# Altium PCB Board.PcbDoc
Units mm, origin at the board's own origin, x right, y up, seen from the top; angles counter-clockwise.
Board outline 40 x 40 mm, 2 copper layers (Top Layer, Bottom Layer); 33 components, 28 nets, 105 pads, 38 vias.
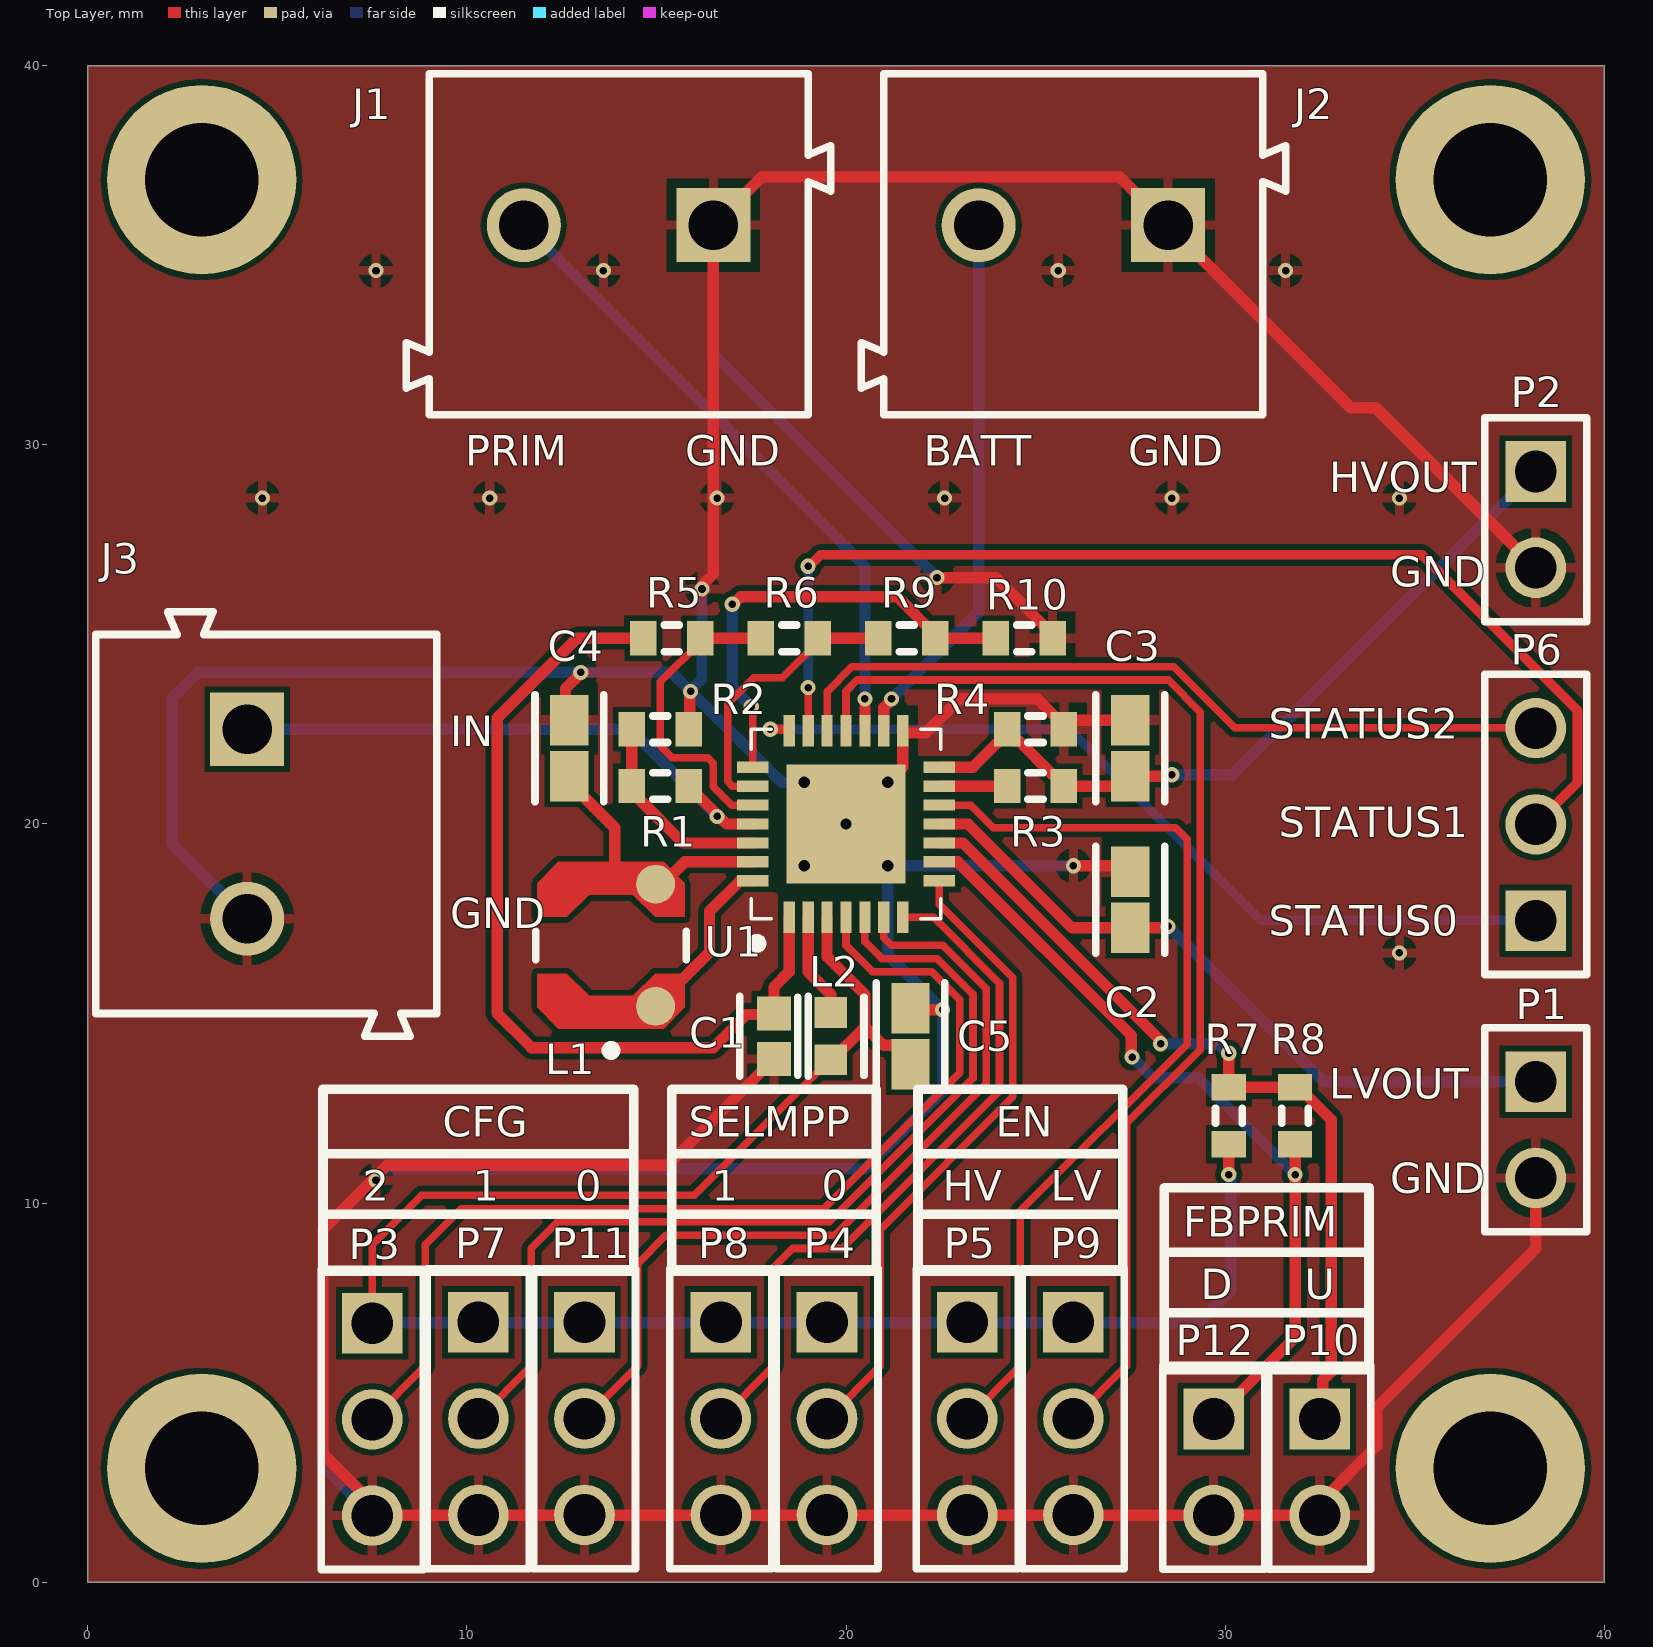
[diagram p0: Top Layer view]
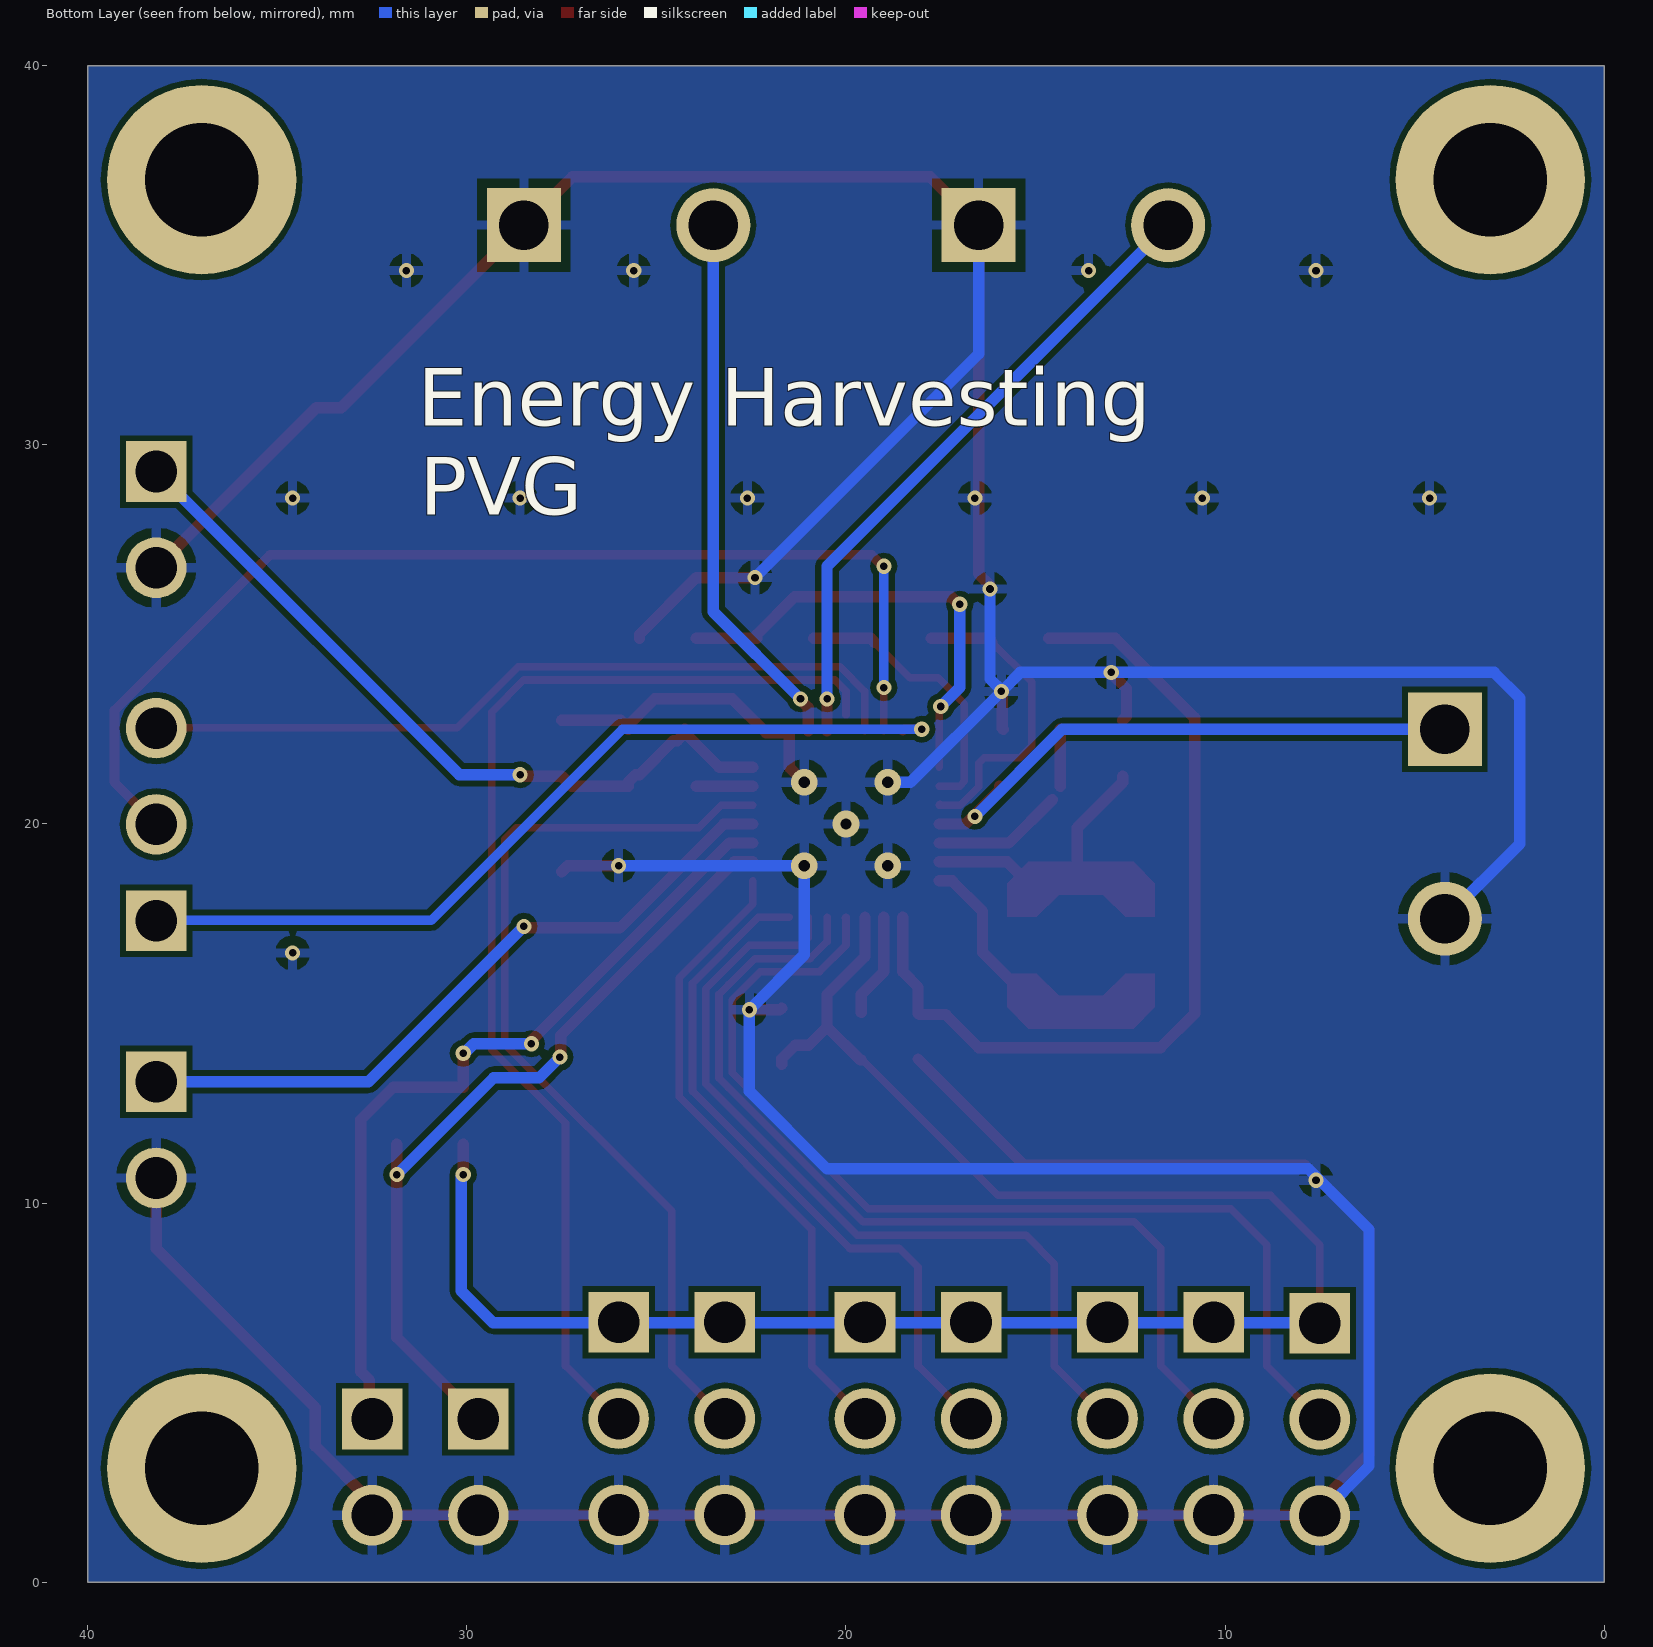
[diagram p1: Bottom Layer view, seen from below]
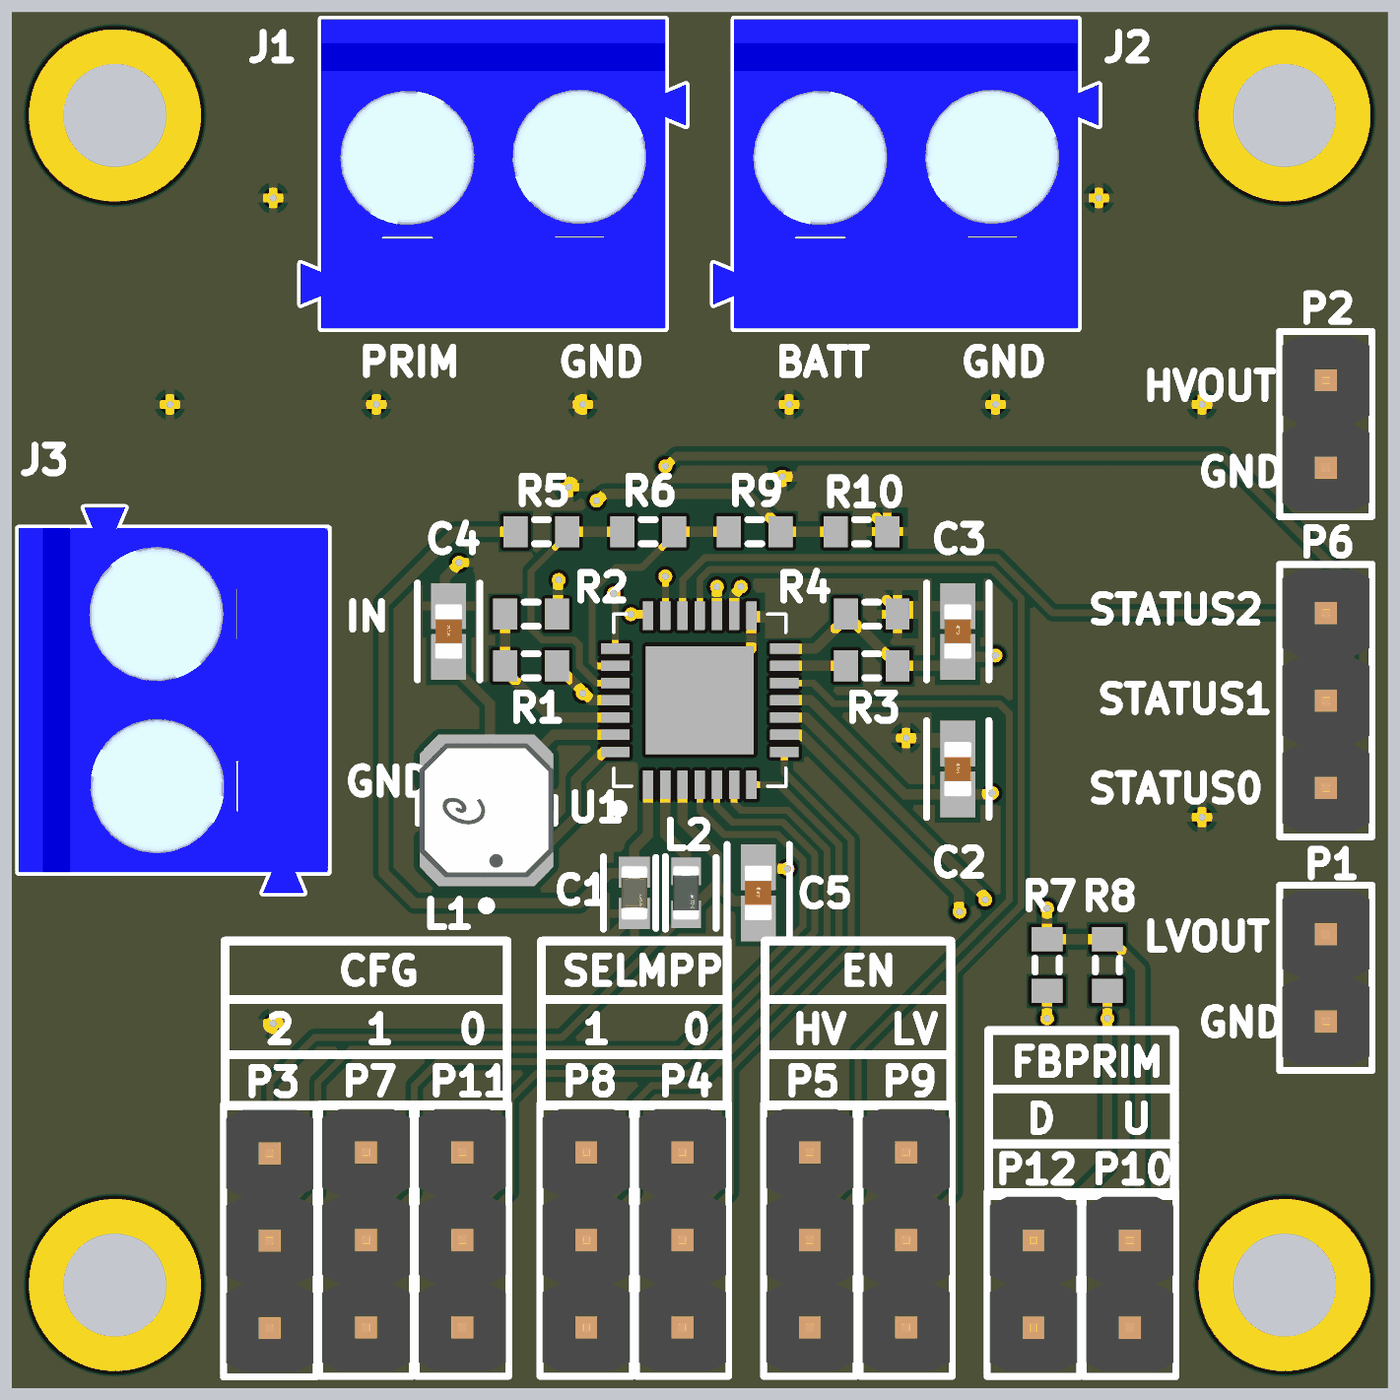
[diagram p2: 3D render of the assembled board from above, using the file's embedded part models]

## Layer stack, top to bottom
Top Solder: solder mask 0.0102, Solder Resist, Dk 3.5
Top Layer: signal copper 0.0356
Dielectric 1: dielectric 0.32, FR-4, Dk 4.8
Bottom Layer: signal copper 0.0356
Bottom Solder: solder mask 0.0102, Solder Resist, Dk 3.5

## Board outline
0,0 0,40 40,40 40,0

## Design rules (kind name [scope] priority, off if disabled: settings)
Clearance [All] p1: gap=0.15 ignorepadtopadclearanceinfootprint=FALSE
PolygonConnect [All] p1: connectstyle=Relief reliefconductorwidth=0.254 reliefentries=4 polygonreliefangle="90 Angle" airgapwidth=0.254
RoutingVias [All] p1: holewidth=0.2 width=0.4 viastyle="Through Hole" minholewidth=0.2 minwidth=0.4 maxholewidth=0.711 maxwidth=1.27
SolderMaskExpansion [All] p1: expansion=0.102 istentingtop=FALSE
Width [All] p1: maxlimit=0.3 minlimit=0.2 preferedwidth=0.254
30 further rules are at their usual default settings.

## Components (designator, comment, footprint, x,y, rotation, side; value= is the part's Value field where it differs from the comment)
C1 "GRM188R61A226ME15D" FP-GRM188-0_2-IPC_C 18.1,14.4 r270 top
C2 "C1608X5R1A106M080AC" FP-C1608-080-0_1-IPC_A 27.5,18 r270 top
C3 "C1608X5R1A106M080AC" FP-C1608-080-0_1-IPC_A 27.5,22 r270 top
C4 "C1608X5R1A106M080AC" FP-C1608-080-0_1-IPC_A 12.7,22 r270 top
C5 "C1608X5R1A106M080AC" FP-C1608-080-0_1-IPC_A 21.7,14.4 r270 top
J1 "691101710002" 691101710002 14,35.3 r180 top
J2 "691101710002" 691101710002 26,35.3 r180 top
J3 "691101710002" 691101710002 4.7,20 r270 top
L1 "LPS4012-103MRB" FP-LPS4012-MFG 13.8,16.8 r90 top
L2 "MLZ1608M100WT000" FP-MLZ1608-IPC_C 19.6,14.4 r270 top
P1 "61300211121" 61300211121 38.2,11.93 r270 top
P2 "61300211121" 61300211121 38.2,28.03 r270 top
P3 "61300311121" 61300311121 7.5,4.29 r270 top
P4 "61300311121" 61300311121 19.5,4.31 r270 top
P5 "61300311121" 61300311121 23.2,4.31 r270 top
P6 "61300311121" 61300311121 38.2,19.99 r90 top
P7 "61300311121" 61300311121 10.3,4.31 r270 top
P8 "61300311121" 61300311121 16.7,4.31 r270 top
P9 "61300311121" 61300311121 26,4.31 r270 top
P10 "61300211121" 61300211121 32.5,3.03 r270 top
P11 "61300311121" 61300311121 13.1,4.31 r270 top
P12 "61300211121" 61300211121 29.7,3.03 r270 top
R1 "Res3" J1-0603 15.1,21 r180 top value=1K
R2 "Res3" J1-0603 15.1,22.5 r0 top value=1K
R3 "Res3" J1-0603 25,21 r0 top value=1K
R4 "Res3" J1-0603 25,22.5 r0 top value=1K
R5 "Res3" J1-0603 15.4,24.9 r0 top value=1K
R6 "Res3" J1-0603 18.5,24.9 r0 top value=1K
R7 "Res3" J1-0603 30.1,12.3 r90 top value=1K
R8 "Res3" J1-0603 31.85,12.3 r270 top value=1K
R9 "Res3" J1-0603 21.6,24.9 r0 top value=1K
R10 "Res3" J1-0603 24.7,24.9 r0 top value=1K
U1 "AEM10941 - Symbol QFN28" "QFN28 5x5mm Pitch=0.5mm ThPad=3.15x3.15mm" 20,20 r90 top

## Footprints (in the part's own frame and the unit in brackets; to place one, negate y for a bottom-side part, rotate by r counter-clockwise, add the part's x,y. Pads: shape width x height; smd on the part's side, far side on the other; paste and mask are expansions set on the pad)
61300211121 [mm] "Pin Header, pitch 2.54 mm, THT, Vertical, single row, 2p"
  rect 1.6x1.6 hole 1.1: 1(-1.27,0)
  round 1.6 hole 1.1: 2(1.27,0)
  silkscreen extent -2.69,-1.35 2.69,1.35, body extent -2.54,-1.27 2.54,1.27, height 8.57
61300311121 [mm] "Pin Header, pitch 2.54 mm, THT, Vertical, single row, 3p"
  rect 1.6x1.6 hole 1.1: 1(-2.54,0)
  round 1.6 hole 1.1: 2(0,0) 3(2.54,0)
  silkscreen extent -3.96,-1.35 3.96,1.35, body extent -3.81,-1.27 3.81,1.27, height 8.57
691101710002 [mm] "5,00mm - modular - blue - Horizontal entry with pressure clamp - 12,6mm height - 02p"
  rect 1.95x1.95 hole 1.3: 1(-2.5,-0.5)
  round 1.95 hole 1.3: 2(2.5,-0.5)
  silkscreen extent -5.6,-4.5 5.6,4.5, body extent -5.6,-4.5 5.6,4.5, height 12.65
FP-C1608-080-0_1-IPC_A [mm]
  rect 1.331x1.012 smd paste+0 mask+0: 1(-0.741,0) 2(0.741,0)
  silkscreen extent -1.41,-0.91 1.41,0.91, body extent -1.91,-1.01 1.91,1.01, height 0.25
FP-GRM188-0_2-IPC_C [mm]
  rect 0.905x0.906 smd paste+0 mask+0: 1(-0.601,0) 2(0.601,0)
  silkscreen extent -1.05,-0.9 1.05,0.9, body extent -1.15,-0.6 1.15,0.6, height 0.25
FP-LPS4012-MFG [mm]
  round 1.026 smd paste+0 mask+0: 1(-1.611,-1.175) 2(1.611,-1.175)
  Top Layer region: -2.2,1.395 -1.64,1.945 -0.75,1.945 -0.75,1.17 -1.33,0.575 -1.33,-0.575 -0.75,-1.17 -0.75,-1.945 -1.64,-1.945 -2.2,-1.395 -2.2,1.395
  Top Layer region: 2.2,1.395 1.64,1.945 0.75,1.945 0.75,1.17 1.33,0.575 1.33,-0.575 0.75,-1.17 0.75,-1.945 1.64,-1.945 2.2,-1.395 2.2,1.395
  silkscreen extent -2.9,-1.99 0.37,1.99, body extent -2.3,-2.09 2.3,2.09, height 0.25
FP-MLZ1608-IPC_C [mm]
  rect 0.806x0.858 smd paste+0 mask+0: 1(-0.626,0) 2(0.626,0)
  silkscreen extent -1.03,-0.87 1.03,0.87, body extent -1.13,-0.58 1.13,0.58, height 0.25
J1-0603 [mm] "Chip Resistor, Body 1.6x0.8mm, IPC High Density"
  rect 0.7x0.9 smd: 1(-0.75,0) 2(0.75,0)
  silkscreen extent -0.2,-0.35 0.2,0.35, body extent -0.85,-0.48 0.85,0.48, height 0.9
"QFN28 5x5mm Pitch=0.5mm ThPad=3.15x3.15mm" [mm]
  rect 0.83x0.3 smd: 1(-2.46,1.5) 2(-2.46,1) 3(-2.46,0.5) 4(-2.46,0) 5(-2.46,-0.5) 6(-2.46,-1) 7(-2.46,-1.5) 15(2.46,-1.5) 16(2.46,-1) 17(2.46,-0.5) 18(2.46,0) 19(2.46,0.5) 20(2.46,1) 21(2.46,1.5)
  rect 0.3x0.83 smd: 8(-1.5,-2.46) 9(-1,-2.46) 10(-0.5,-2.46) 11(0,-2.46) 12(0.5,-2.46) 13(1,-2.46) 14(1.5,-2.46) 22(1.5,2.46) 23(1,2.46) 24(0.5,2.46) 25(0,2.46) 26(-0.5,2.46) 27(-1,2.46) 28(-1.5,2.46)
  rect 3.15x3.15 smd: 29(0,0)
  silkscreen extent -3.27,-2.5 2.5,2.5, body extent -2.5,-2.5 2.5,2.5, height 0.9

## Part data
C1: library part CMP-2000-06337-3, "Chip Multilayer Ceramic Capacitors for General Purpose, 0603, 22uF, X5R, 15%, 20%, 10V", Capacitance=22uF, Case Code (Imperial)=0603, Case Code (Metric)=1608, Dielectric=X5R, Max Operating Temperature=85°C, Min Operating Temperature=-55°C, Package Quantity=4000, Tolerance=20%, Voltage Rating=10V, Case/Package=0603, Depth=0.8mm, Height=0.8mm, Lead Free="Lead Free", Length=1.6mm, Material=Ceramic, Mount="Surface Mount", Packaging="Tape and Reel", REACH SVHC="No SVHC", Termination=SMD/SMT, Thickness=0.039inch, Voltage Rating (DC)=10V, Weight=0.000222oz, Width=0.8mm
C2 C3 C4 C5: library part CMP-2000-04980-2, "Multilayer Ceramic Capacitors 10μF ±20% 10V X5R SMD 0603", Capacitance=10uF, Case Code (Imperial)=0603, Case Code (Metric)=1608, Dielectric=X5R, Dielectric Material=Ceramic, Max Operating Temperature=85°C, Min Operating Temperature=-55°C, Package Quantity=1, Tolerance=20%, Voltage Rating=10V, Case/Package=0603, Construction=Flat, Depth=0.8mm, Height=0.8mm, Lead Free="Lead Free", Length=1.6mm, Mount="Surface Mount", Number of Pins=2, Packaging="Tape and Reel", Radiation Hardening=No, REACH SVHC="No SVHC", Resistor Type=Ceramic, RoHS Compliant=Yes, Series=C, Termination=SMD/SMT, Thickness=0.035inch, Voltage Rating (DC)=10V, Weight=7.1E-05oz, Width=0.031inch
J1 J2 J3: library part CMP-1502-03256-1, "Series 101 - 5.00 mm Horizontal Entry Modular with Pressure Clamp WR-TBL, 2 pin", Manufacturer="Wurth Elektronik", Operating Temperature=-40to105degC, Datasheet URL=http://katalog.we-online.de/em/datasheet/6911017100xx.pdf, Manufacturer URL=http://www.we-online.de, Mounting Technology=THT, Package Reference=691101710002, Packaging=Box, Part Number=691101710002, Pin Number=2, Pitch=5.00mm, Publisher=WurthElektronik
L1: library part CMP-11268-000103-1, "Power Inductor (SMD), 10 µH, 550 mA, Shielded, 1 A, LPS4012 Series, 3.9mm x 3.9mm x 1.1mm", DC Resistance (DCR)=350mR, Inductance=10uH, Inductance Tolerance=20%, Max DC Current=1.1A, Max Operating Temperature=85°C, Min Operating Temperature=-40°C, Package Quantity=1, RMS Current (Irms)=550mA, Saturation Current=1A, Self Resonant Frequency=40MHz, Test Frequency=100kHz, Core Material=Ferrite, Height=1.1mm, Length=4mm, Packaging="Cut Tape", REACH SVHC="No SVHC", RoHS Compliant=Yes, Shielding=Shielded, Termination=SMD/SMT, Tolerance=20%, Weight=0.002258oz, Width=4mm
L2: library part CMP-08253-000012-2, "Shielded Multilayer Inductor 10uH ±20% 250mA 1365mΩ SMD 0603", Case Code (Imperial)=0603, Case Code (Metric)=1608, Current Rating=250mA, DC Resistance (DCR)=1.365R, Inductance=10uH, Max Operating Temperature=125°C, Min Operating Temperature=-55°C, Package Quantity=4000, Resistance=1.05R, Saturation Current=90mA, Self Resonant Frequency=50MHz, Test Frequency=2MHz, Tolerance=20%, Case/Package=0603, Core Material=Ferrite, Height - Seated (Max)=0.037inch, Length=0.063inch, Mount="Surface Mount", Packaging="Tape and Reel", RoHS Compliant=Yes, Shielding=Shielded, Width=0.031inch
P1 P2 P10 P12: library part CMP-1712-00002-4, "THT Vertical Pin Header WR-PHD, Pitch 2.54 mm, Single Row, 2 pins", Contact Resistance=20mOhm, Manufacturer="Wurth Elektronik", Operating Temperature=-40to105degC, Rated Current=3A, Withstanding Voltage=500VAC, Working Voltage=250VAC, Datasheet URL=https://katalog.we-online.de/em/datasheet/6130xx11121.pdf, Gender=Male, Manufacturer URL=http://www.we-online.de, Mounting Technology=THT, Orientation=Vertical, Package Reference=61300211121, Packaging=Bag, Part Number=61300211121, Pin Number=2, Pitch=2.54mm, Publisher=WurthElektronik, Row Number=Single
P3 P4 P5 P6 P7 P8 P9 P11: library part CMP-1502-01062-1, "THT Vertical Pin Header WR-PHD, Pitch 2.54 mm, Single Row, 3 pins", Contact Resistance=20mOhm, Manufacturer="Wurth Elektronik", Operating Temperature=-40to105degC, Rated Current=3A, Withstanding Voltage=500VAC, Working Voltage=250VAC, Datasheet URL=https://katalog.we-online.de/em/datasheet/6130xx11121.pdf, Gender=Male, Manufacturer URL=http://www.we-online.de, Mounting Technology=THT, Orientation=Vertical, Package Reference=61300311121, Packaging=Bag, Part Number=61300311121, Pin Number=3, Pitch=2.54mm, Publisher=WurthElektronik, Row Number=Single
R1 R2 R3 R4 R5 R6 R7 R8 R9 R10: "Resistor", LatestRevisionDate=29-May-2009, LatestRevisionNote="IPC-7351 Footprint Added.", PackageDescription="Chip Resistor", PackageReference=J1-0603, Published=8-Jun-2000, Publisher="Altium Limited"

## Free pads (board coordinates)
  round 5 hole 3: 1(3,3) 1(3,37) 1(37,3) 1(37,37)

## Via types
v1: diameter 0.4, hole 0.2, Top Layer to Bottom Layer, 33 vias
v2: diameter 0.7, hole 0.3, Top Layer to Bottom Layer, 5 vias

## Nets (pads, with @x,y where several pads share a name; then routed paths per layer and width w, separated by ;. In a path a pad name is that pad's centre, name@x,y a point inside that pad or via, vN(x,y) a via of type N, cw(c..) or ccw(c..) an arc to the next point about the centre after c; other vN are vias at no path point)
BAL: C1.2 C2.1 C3.1 C4.1 C5.1 J1.1 J2.1 J3.2 P1.2 P2.2 P3.3 P4.3 P5.3 P7.3 P8.3 P9.3 P10.2 P11.3 P12.2 R2.2 R4.2 R10.2 U1.15 U1.29 | length 188.1
  Top Layer w0.3: C4.1 12.6,22.841 12.6,23.573 13,23.973 v1(13,24) ; R2.2 15.881,22.531 15.881,23.481 v1(15.9,23.5) ; v1(16.2,26.2) 16.2,26.3 16.5,26.6 J1.1 17.775,37.075 27.225,37.075 J2.1 33.318,30.982 33.978,30.982 P2.2 ; C1.2 15.3,11 7.9,11 6.2,9.3 6.2,3.385 7.5,2.085 7.5,1.76 10.3,1.76 13.1,1.76 16.7,1.76 19.5,1.76 23.2,1.76 26,1.76 P12.2 P10.2 32.5,2.085 34,3.585 34,4.6 38.2,8.8 P1.2 ; v2(21.1,21.1) 21.5,21.5 U1.15@21.5,22.4 ; U1.15 U1.15@21.5,22.4 ; C5.1 21.741,15.1 v1(22.55,15.1) ; v1(22.4,26.5) 23.95,26.5 25.45,25 R10.2 ; R4.2 R4.2@25.75,22.541 ; v1(26,18.9) 27.341,18.9 C2.1 ; C3.1 25.95,22.741 R4.2@25.75,22.541 ; U1.15@21.5,22.4 22.1,22.4 23,23.3 25.05,23.3 25.75,22.6 R4.2@25.75,22.541
  Bottom Layer w0.3: J3.2 2.224,19.476 2.224,23.324 2.9,24 v1(13,24) 15.4,24 v1(15.9,23.5) ; P3.3@7.5,1.76 6.2,3.06 6.2,9.3 7.8,10.9 20.5,10.9 22.55,12.95 v1(22.55,15.1) 21.1,16.55 v2(21.1,18.9) v1(26,18.9) ; v1(16.2,26.2) 16.2,23.827 15.9,23.527 v1(15.9,23.5) ; J1.1 16.5,32.4 v1(22.4,26.5) ; v2(18.9,21.1) 18.3,21.1 v1(15.9,23.5)
  other v1: 7.6,10.6 34.6,16.6 4.6,28.6 10.6,28.6 16.6,28.6 22.6,28.6 28.6,28.6 34.6,28.6 7.6,34.6 13.6,34.6 25.6,34.6 31.6,34.6
  other v2: 18.9,18.9 20,20
BATT: J2.2 U1.16 | length 14.4
  Top Layer w0.2: U1.16 U1.16
  Top Layer w0.3: U1.16 21,23.073 21.2,23.273 v1(21.2,23.3)
  Bottom Layer w0.3: v1(21.2,23.3) 23.5,25.6 J2.2
BOOST: C1.1 R5.1 U1.1 | length 23.3
  Top Layer w0.3: R5.1 12.9,24.9 10.8,22.8 10.8,15 11.7,14.1 16.5,14.1 17.373,14.973 18.072,14.973 C1.1 18.1,15.7 18.5,16.1 U1.1
BUCK: C5.2 L2.2 P3.1 P4.1 P5.1 P7.1 P8.1 P9.1 P11.1 R7.1 U1.3 | length 49.3
  Top Layer w0.2: P3.1@7.5,6.84 7.5,8.9 8.8,10.2 16,10.2 19.574,13.774 L2.2
  Top Layer w0.3: U1.3 19.5,16.5 20.5,15.5 20.5,14.648 ; L2.2 19.626,13.774 20.5,14.648 ; C5.2 21.7,13.802 21.344,14.158 20.99,14.158 20.5,14.648 ; v1(30.1,10.75) R7.1
  Bottom Layer w0.3: P3.1@7.5,6.84 10.3,6.84 13.1,6.84 16.7,6.84 19.5,6.84 23.2,6.84 26,6.84 29.313,6.84 30.15,7.677 30.15,10.7 v1(30.1,10.75)
BUFSRC: C4.2 L1.2 U1.27 | length 7.1
  Top Layer w0.3: C4.2 12.7,21.1 13.9,19.9 13.9,18.676 14.026,18.55 14.836,18.55 L1.2 15.158,18.411 15.747,19 U1.27
CFG0: P11.2 U1.6 | length 22.2
  Top Layer w0.2: P11.2@13.1,4.3 14.5,5.7 14.5,8.4 15.25,9.15 19.706,9.15 23.45,12.894 23.7,13.144 23.7,15.656 23.45,15.906 22.556,16.8 21.2,16.8 21,17 U1.6
CFG1: P7.2 U1.5 | length 24.9
  Top Layer w0.2: P7.2@10.3,4.3 11.7,5.7 11.7,8.8 12.4,9.5 19.561,9.5 23.1,13.039 23.35,13.289 23.35,15.511 23.1,15.761 22.411,16.45 20.95,16.45 20.5,16.9 U1.5
CFG2: P3.2 U1.4 | length 27.5
  Top Layer w0.2: P3.2@7.5,4.3 8.9,5.7 8.9,8.9 9.85,9.85 19.416,9.85 23,13.434 23,15.366 22.266,16.1 20.7,16.1 20,16.8 U1.4 U1.4@20.025,17.515
ENHV: P5.2 U1.12 | length 24.6
  Top Layer w0.2: U1.12 23.288,20.5 23.888,19.9 28.7,19.9 29,19.6 29,14.195 24.6,9.795 24.6,5.7 P5.2@23.2,4.3
ENLV: P9.2 U1.18 | length 30.5
  Top Layer w0.2: 20,22.884 20,23.5 20.3,23.8 28.5,23.8 29.35,22.95 29.35,14.05 27.4,12.1 27.4,5.7 P9.2@26,4.3
FB_COLD: R1.2 R2.1 U1.26 | length 5
  Top Layer w0.3: R1.2 R2.1 ; R1.2@14.56,20.64 15.7,19.5 U1.26
FB_HV: R3.1 U1.13 | length 1.5
  Top Layer w0.3: U1.13 R3.1@23.95,21
FBPRIM_D: P12.1 R8.2 U1.9 | length 21.3
  Top Layer w0.3: U1.9 22.949,19 27.531,14.418 27.531,13.869 v1(27.55,13.85) ; P12.1 31.85,6.45 R8.2
  Bottom Layer w0.3: v1(27.55,13.85) 28.1,13.3 29.3,13.3 v1(31.85,10.75)
FBPRIM_U: P10.1 R7.2 R8.1 U1.10 | length 22
  Top Layer w0.3: U1.10 23.086,19.5 28.281,14.305 28.281,14.219 v1(28.3,14.2) ; v1(30.1,13.95) R7.2 31.95,13.05 32.8,12.2 32.8,5.55 32.574,5.324 32.574,4.374 P10.1
  Bottom Layer w0.3: v1(28.3,14.2) 29.823,14.2 30.073,13.95 v1(30.1,13.95)
HVOUT: C3.2 P2.1 R3.2 R4.1 U1.14 | length 20.3
  Top Layer w0.3: U1.14 23.35,21.5 R4.1@24.25,22.4 ; R4.1 R4.1@24.25,22.4 ; v1(28.6,21.3) 28.573,21.3 28.532,21.259 C3.2 27.241,21 R3.2 25.75,21.1 25.55,21.3 25.45,21.3 24.55,22.2 24.45,22.2 R4.1@24.25,22.4
  Bottom Layer w0.3: v1(28.6,21.3) 30.2,21.3 P2.1
LVOUT: C2.2 P1.1 U1.11 | length 18.6
  Top Layer w0.3: U1.11 23.222,20 25.963,17.259 C2.2 28.432,17.259 28.473,17.3 v1(28.5,17.3)
  Bottom Layer w0.3: v1(28.5,17.3) 32.6,13.2 P1.1
NetP6_1: P6.1 U1.21 | length 22.8
  Top Layer w0.254: v1(18,22.5) 18.477,22.5 18.5,22.477 U1.21
  Bottom Layer w0.254: v1(18,22.5) 25.9,22.5 30.94,17.46 P6.1@38.2,17.46
NetP6_2: P6.2 U1.20 | length 29.9
  Top Layer w0.2: U1.20 v1(19,23.6)
  Top Layer w0.254: v1(19,26.8) 19.022,26.8 19.322,27.1 35.2,27.1 39.3,23 39.3,21.1 P6.2@38.2,20
  Bottom Layer w0.254: v1(19,23.6) v1(19,26.8)
NetP6_3: P6.3 U1.19 | length 20.7
  Top Layer w0.2: U1.19 19.5,23.495 20.155,24.15 28.65,24.15 30.26,22.54 P6.3@38.2,22.54
PRIM: J1.2 U1.17 | length 17.1
  Top Layer w0.3: U1.17 v1(20.5,23.3)
  Bottom Layer w0.3: J1.2 20.5,26.8 v1(20.5,23.3)
SELMPP0: P4.2 U1.8 | length 17
  Top Layer w0.2: P4.2@19.5,4.3 20.9,5.7 20.9,9.3 24.4,12.8 24.4,15.946 22.46,17.886 U1.8
SELMPP1: P8.2 U1.7 | length 18.6
  Top Layer w0.2: P8.2@16.7,4.3 18.1,5.7 18.1,8.3 18.6,8.8 19.9,8.8 24.05,12.95 24.05,15.801 22.311,17.54 U1.7
SET_CHRDY: R6.2 R9.1 U1.23 | length 7.5
  Top Layer w0.2: U1.23 17,21 16.875,21.125 16.875,23.175 17.562,23.862 18.312,23.862 R6.2@19.25,24.8
  Top Layer w0.3: R6.2@19.25,24.8 19.35,24.9 R9.1
SET_OVCH: R9.2 R10.1 U1.22 | length 12.1
  Top Layer w0.2: U1.22 v1@17.54,23.1
  Top Layer w0.3: v1(17,25.8) 17.026,25.8 17.226,26 21.35,26 22.35,25 R9.2 R10.1
  Bottom Layer w0.3: v1(17,25.8) 17,23.6 v1(17.5,23.1)
SET_OVDIS: R5.2 R6.1 U1.24 | length 8.3
  Top Layer w0.2: R5.2@16.15,24.8 15.1,23.75 15.1,22.067 15.417,21.75 16.35,21.75 16.5,21.6 16.5,20.989 16.989,20.5 U1.24 U1.24@17.521,20.519
  Top Layer w0.3: R5.2@16.15,24.8 16.25,24.9 R6.1
SRC: J3.1 R1.1 U1.25 | length 15.4
  Top Layer w0.3: R1.1@15.95,21 15.95,20.9 16.85,20 U1.25
  Bottom Layer w0.3: J3.1 14.3,22.5 v1(16.6,20.2)
SWBOOST: L1.1 U1.28 | length 4.6
  Top Layer w0.3: L1.1 16.4,16.614 16.4,17.7 17.2,18.5 U1.28
SWBUCK: L2.1 U1.2 | length 2.8
  Top Layer w0.3: U1.2 19,16.1 19.6,15.5 L2.1

## Polygon pours and split planes (outlines as drawn)
BAL on Top Layer "BAL_L01_P000" (solid, pour order 0): 0,0 0,40 40,40 40,0
BAL on Bottom Layer "BAL_L02_P001" (solid, pour order 1): 0,0 0,40 40,40 40,0

## Silkscreen, mask and mechanical layers (free items; w line width, h text height)
Top Overlay:
  lines w0.254: 6.2,8.2 14.4,8.2 14.4,11.3 6.2,11.3 6.2,8.2 ; 6.2,9.7 14.4,9.7 14.4,13 6.2,13 6.2,9.7 ; 15.4,8.2 20.8,8.2 20.8,11.3 15.4,11.3 15.4,8.2 ; 15.4,9.7 20.8,9.7 20.8,13 15.4,13 15.4,9.7 ; 21.9,8.2 27.3,8.2 27.3,11.3 21.9,11.3 21.9,8.2 ; 21.9,9.7 27.3,9.7 27.3,13 21.9,13 21.9,9.7 ; 28.4,5.6 33.8,5.6 33.8,8.7 28.4,8.7 28.4,5.6 ; 28.4,7.1 33.8,7.1 33.8,10.4 28.4,10.4 28.4,7.1
  text "PRIM" at 9.954,29.454 h0.8
  text "GND" at 15.753,29.454 h0.8
  text "BATT" at 22.054,29.454 h0.8
  text "GND" at 27.453,29.454 h0.8
  text "HVOUT" at 32.754,28.754 h0.8
  text "GND" at 34.353,26.254 h0.8
  text "STATUS2" at 31.155,22.254 h0.8
  text "IN" at 9.553,22.054 h0.8
  text "STATUS1" at 31.421,19.654 h0.8
  text "GND" at 9.554,17.254 h0.8
  text "STATUS0" at 31.155,17.054 h0.8
  text "LVOUT" at 32.754,12.754 h0.8
  text "CFG" at 9.354,11.754 h0.8
  text "SELMPP" at 15.854,11.754 h0.8
  text "EN" at 23.954,11.754 h0.8
  text "GND" at 34.353,10.254 h0.8
  text "2" at 7.254,10.054 h0.8
  text "1" at 10.154,10.054 h0.8
  text "0" at 12.854,10.054 h0.8
  text "1" at 16.454,10.054 h0.8
  text "0" at 19.354,10.054 h0.8
  text "HV" at 22.554,10.054 h0.8
  text "LV" at 25.404,10.054 h0.8
  text "FBPRIM" at 28.904,9.104 h0.8
  text "D" at 29.354,7.454 h0.8
  text "U" at 32.104,7.454 h0.8
Bottom Overlay:
  text "Energy Harvesting" at 31.295,30.512 h1.52
  text "PVG" at 31.246,28.154 h1.52
Mechanical 1:
  the board outline again, w0.254